# Altium PCB PCB_Heartband.PcbDoc
Units mm, origin at the board's own origin, x right, y up, seen from the top; angles counter-clockwise.
Board outline 44.96 x 25.27 mm, 4 copper layers (Top Layer, GND Plane, Power Plane, Bottom Layer), stack 1.508 mm thick; 36 components, 39 nets, 190 pads, 97 vias.
Unrouted connection lines stored in the file: 78.
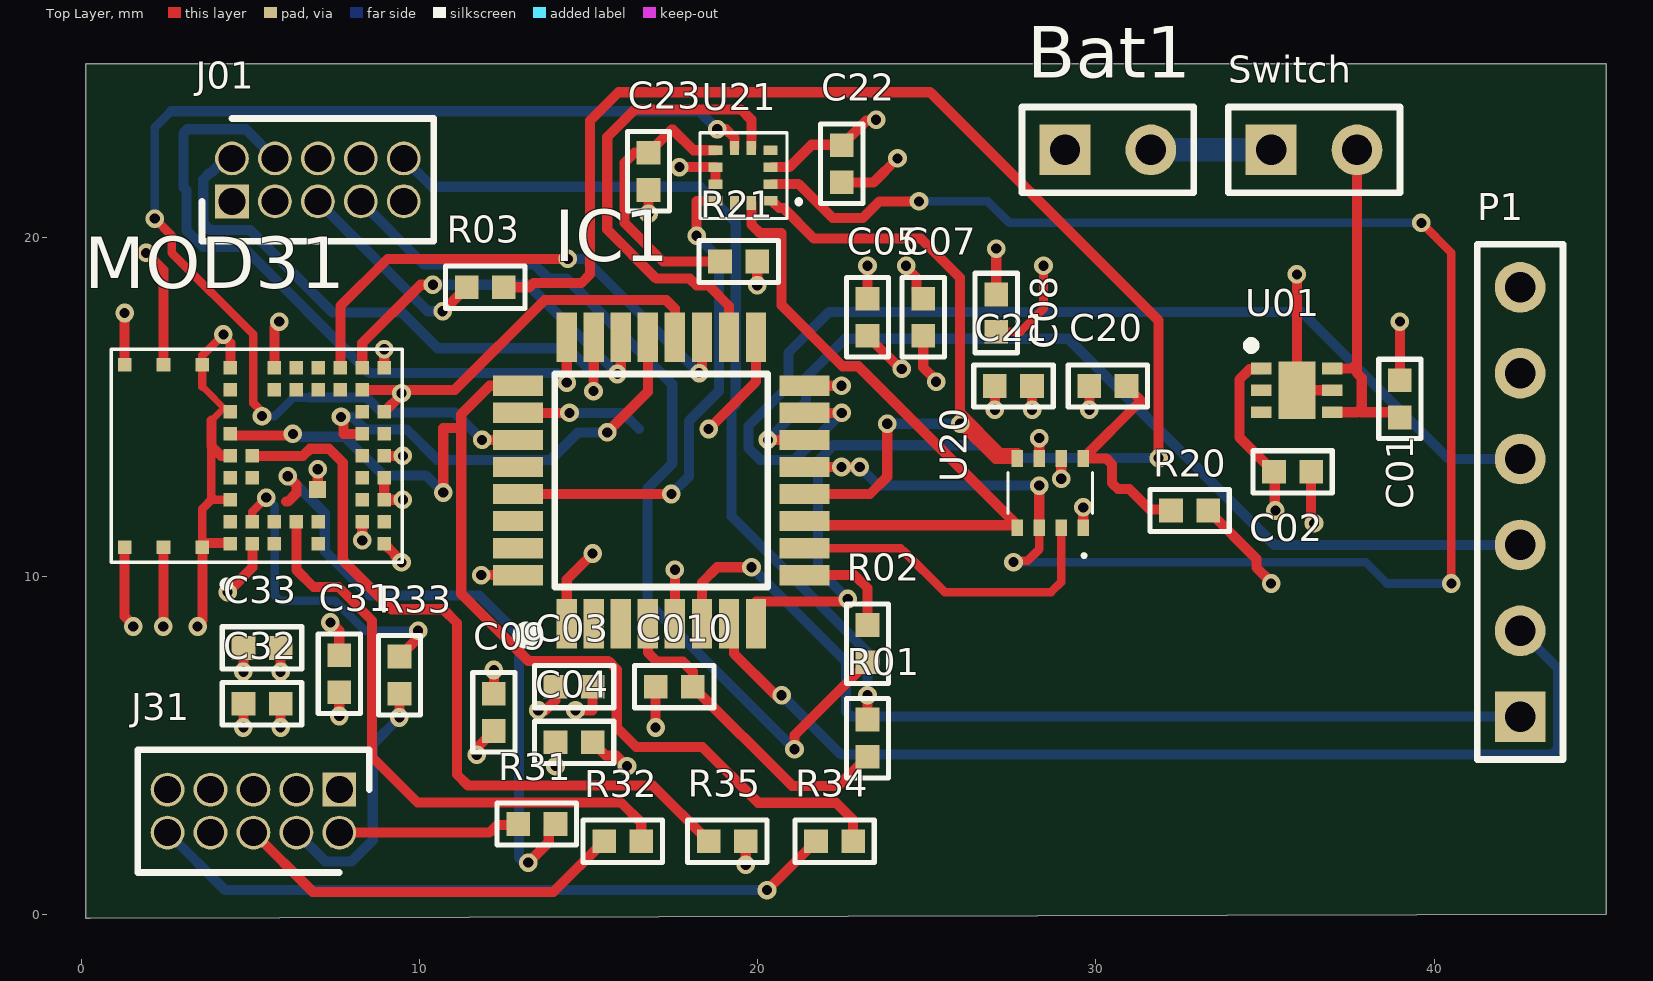
[diagram p0: Top Layer view]
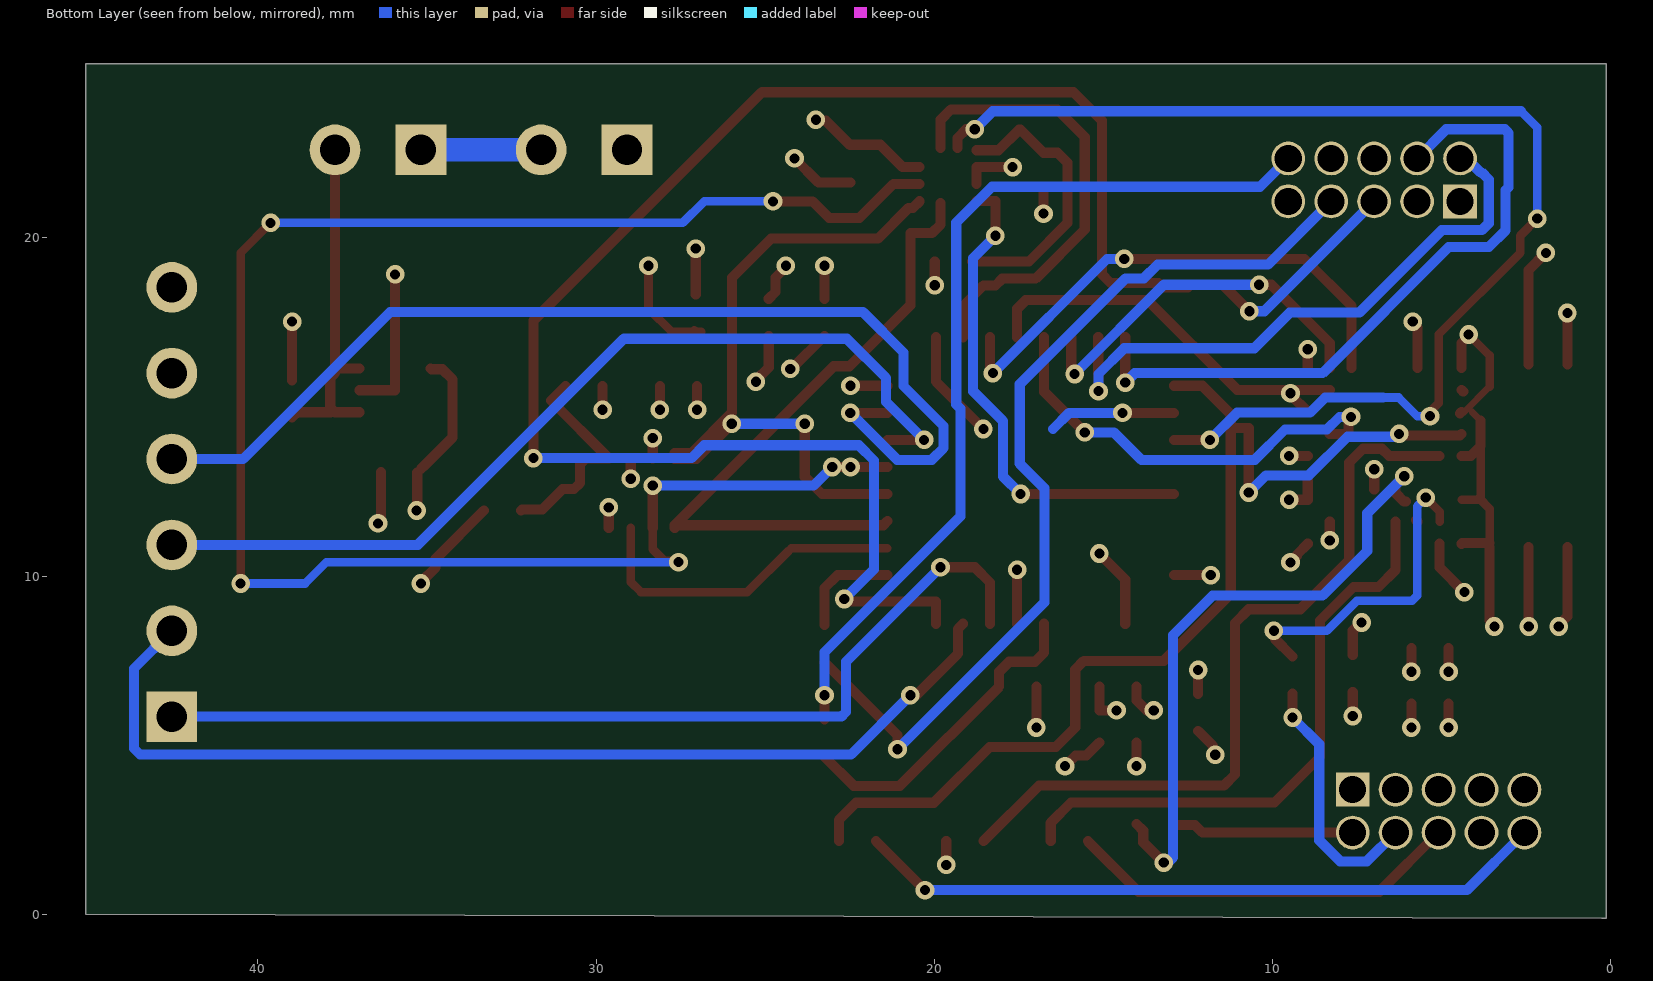
[diagram p1: Bottom Layer view, seen from below]
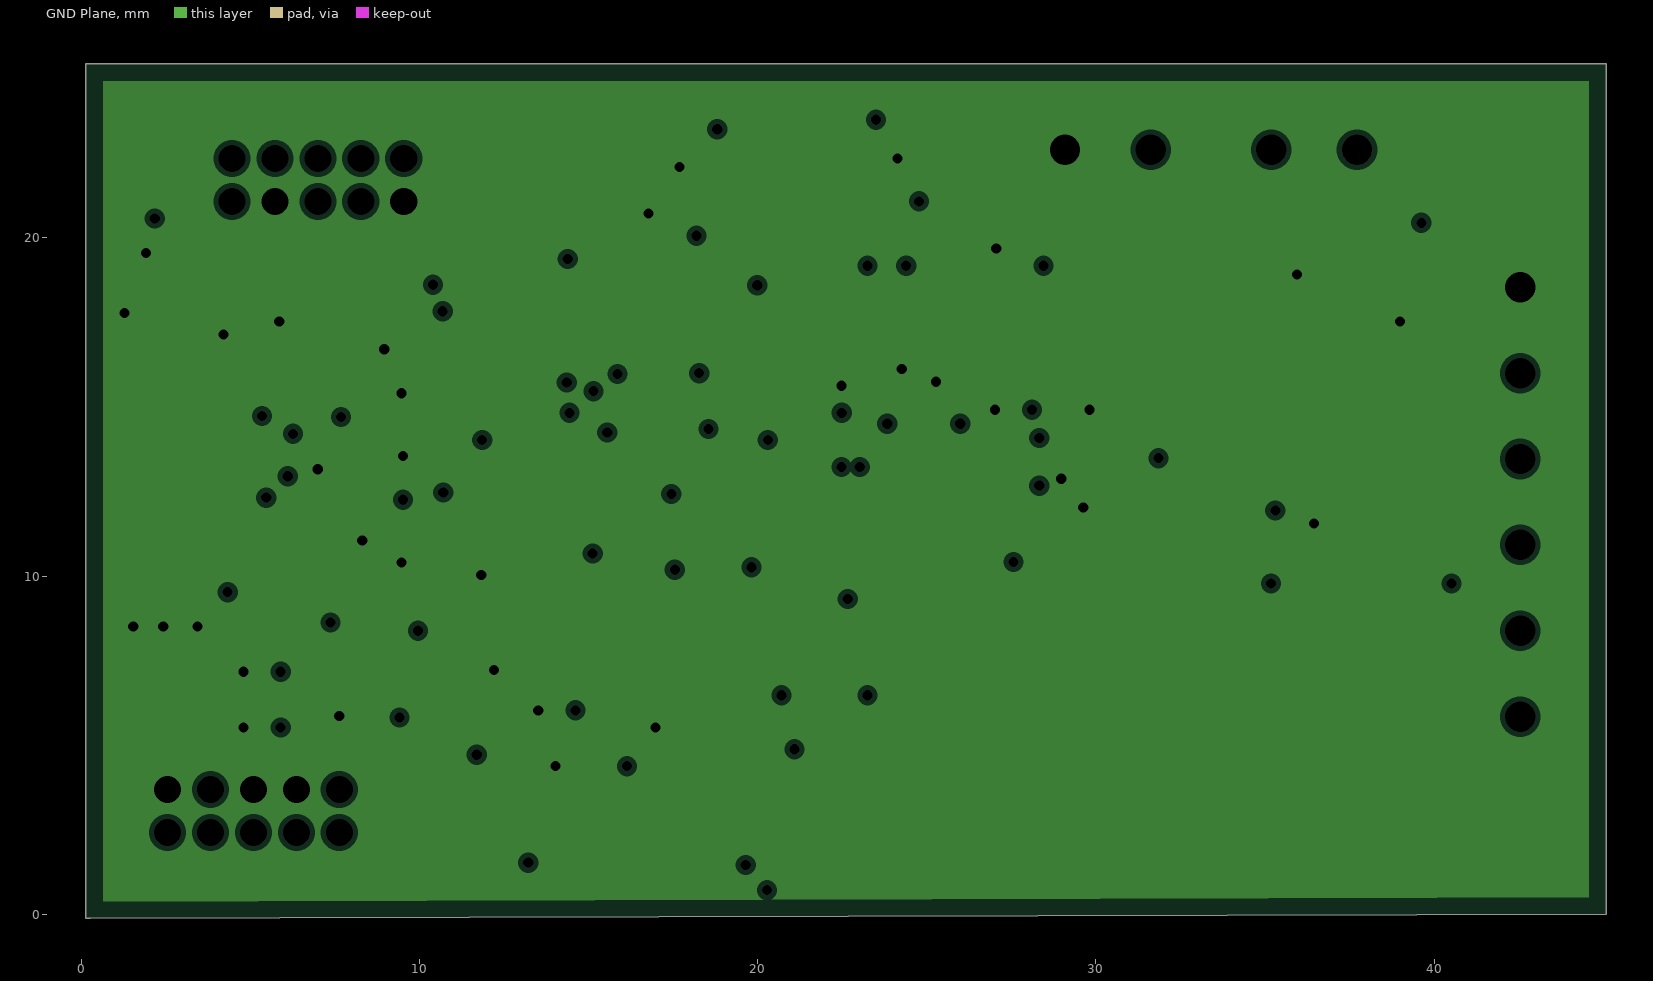
[diagram p2: GND Plane, clearances drawn from the general rule]
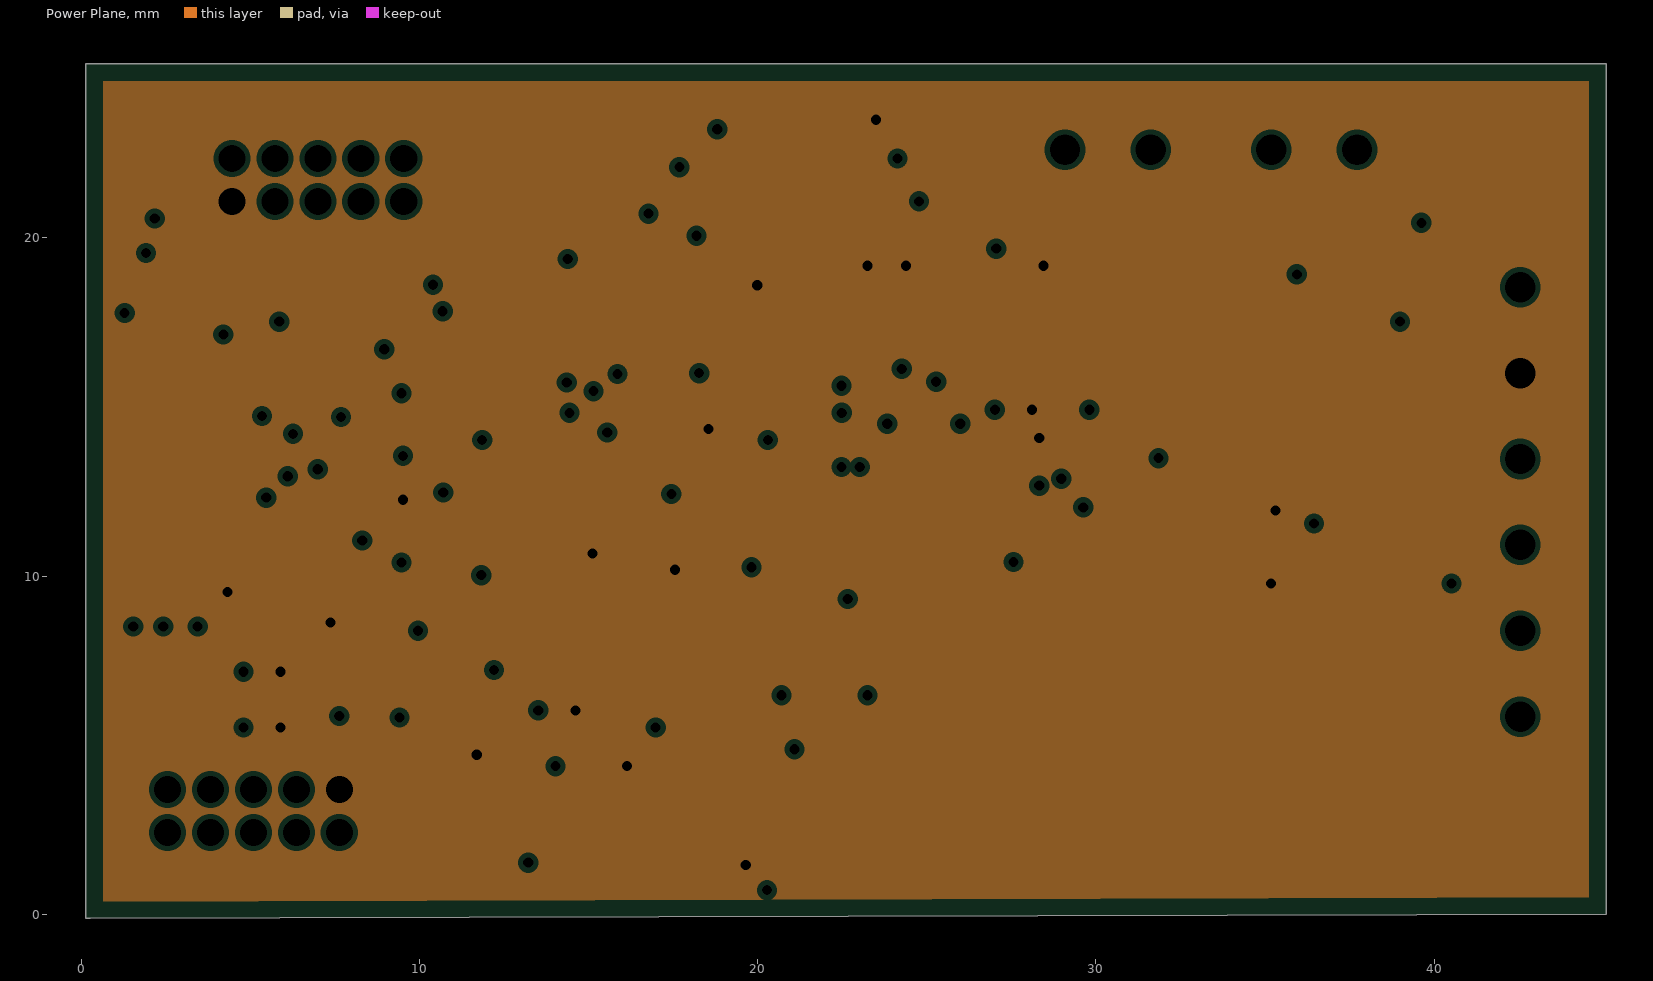
[diagram p3: Power Plane, clearances drawn from the general rule]
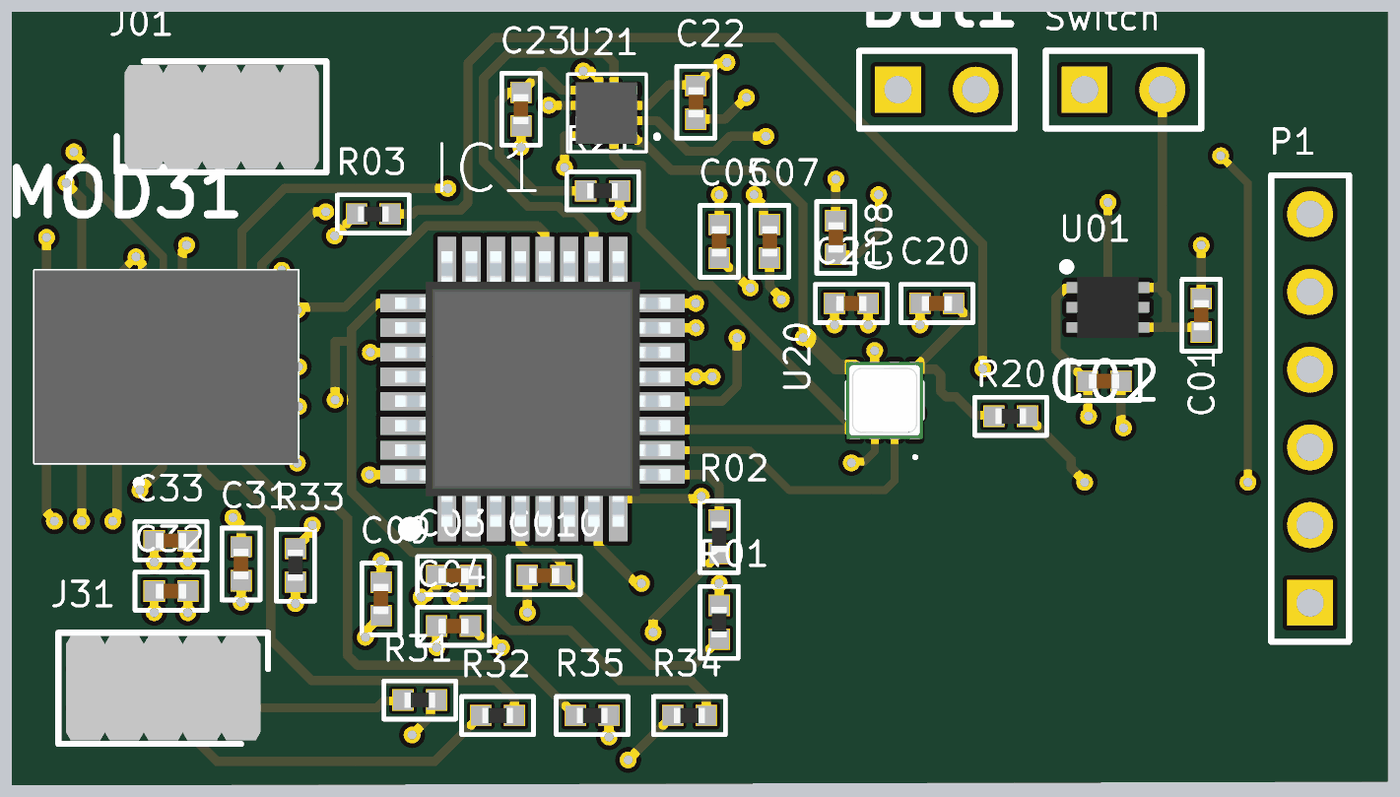
[diagram p4: 3D render of the assembled board from above, using the file's embedded part models]

## Layer stack, top to bottom
Top Solder: solder mask 0.0102, Solder Resist, Dk 3.5
Top Layer: signal copper 0.0356
Prepeg 11: prepreg 0.1727, PP-006, Dk 4.1
Prepreg 12: prepreg 0.1727, PP-006, Dk 4.1
GND Plane: plane copper 0.0178, net GND
CoreDielectric: prepreg 0.71, FR-4, Dk 4.8
Power Plane: plane copper 0.0178, net Vcc
Prepreg 21: prepreg 0.1727, PP-006, Dk 4.1
Prepreg 22: prepreg 0.1727, PP-006, Dk 4.1
Bottom Layer: signal copper 0.0356
Bottom Solder: solder mask 0.0102, Solder Resist, Dk 3.5

## Board outline
45.085,0 45.085,0.254 45.085,25.146 0.127,25.146 0.127,-0.127 0.254,-0.127

## Design rules (kind name [scope] priority, off if disabled: settings)
BoardOutlineClearance [All] p1: gap=0.2 ignorepadtopadclearanceinfootprint=FALSE
Clearance Clearance_safe [All] p1: gap=0.2 ignorepadtopadclearanceinfootprint=FALSE except(0.25: Arc-Hole Track-Hole SMDPad-Hole THPad-Hole Via-Hole Fill-Hole Poly-Hole Region-Hole Text-Hole)
Clearance Clearance_min [All] p2: gap=0.102 ignorepadtopadclearanceinfootprint=FALSE except(0.127: Arc-Via Track-Via SMDPad-Via THPad-Via Via-Via Via-Fill Via-Poly Via-Region Via-Text; 0.25: Arc-Hole Track-Hole SMDPad-Hole THPad-Hole Via-Hole Fill-Hole Poly-Hole Region-Hole Text-Hole)
ComponentClearance [All] p1: gap=0.102 collisioncheckmode=3 verticalgap=0.102 showdistances=TRUE
DiffPairsRouting [All] p1: maxlimit=0.102 minlimit=0.102 mostfreqgap=0.102 toplayer_minwidth=0.102 toplayer_maxwidth=1816.048 toplayer_prefwidth=0.102 bottomlayer_minwidth=0.102 bottomlayer_maxwidth=1816.048 bottomlayer_prefwidth=0.102 maxuncoupledlength=12.7
Height [All] p1: minheight=0 maxheight=1816.048 prefheight=12.7
HoleSize [All] p1: absolutevalues=TRUE maxlimit=6.3 minlimit=0.15 maxpercent=80.000 minpercent=20.000
HoleToHoleClearance [All] p1: gap=0.25 allowstackedmicrovias=FALSE
MinimumAnnularRing [All] p1: minimumring=0.076
MinimumSolderMaskSliver [All] p1: minsoldermaskwidth=0
PlaneClearance [All] p1: clearance=0.15
PlaneConnect PlaneConnectPowerPads [InPadClass('PowerPads')] p1: planeconnectstyle=Direct reliefexpansion=0.5 reliefentries=4 reliefconductorwidth=0.4 reliefairgap=0.2
PlaneConnect [All] p2: planeconnectstyle=Direct reliefexpansion=0.3 reliefentries=4 reliefconductorwidth=0.2 reliefairgap=0.15
PolygonConnect PolygonConnectPowerPads [All vs (InPadClass('PowerPads'))] p1: connectstyle=Direct reliefconductorwidth=0.254 reliefentries=4 polygonreliefangle="90 Angle" airgapwidth=0.254
PolygonConnect [All] p2: connectstyle=Direct reliefconductorwidth=0.102 reliefentries=4 polygonreliefangle="90 Angle" airgapwidth=0.102
RoomDefinition U_BL653u [InComponentClass('U_BL653u')] p1: confinementstyle=ConfineOut formatcopy=TRUE lockcomponents=FALSE outline -64.008,-0.127 -13.208,-0.127 -13.208,25.273 -64.008,25.273
RoomDefinition U_DigitalSensors [InComponentClass('U_DigitalSensors')] p2: confinementstyle=ConfineOut formatcopy=TRUE lockcomponents=FALSE outline -64.008,-0.254 -13.208,-0.254 -13.208,25.146 -64.008,25.146
RoomDefinition U_CPU&POWER [InComponentClass('U_CPU&POWER')] p3: confinementstyle=ConfineOut formatcopy=TRUE lockcomponents=FALSE outline -63.881,-0.254 -13.081,-0.254 -13.081,25.146 -63.881,25.146
RoutingVias [All] p1: holewidth=0.3 width=0.45 viastyle="Through Hole" minholewidth=0.3 minwidth=0.45 maxholewidth=6.3 maxwidth=6.55
SilkToSilkClearance [All] p1: silktosilkclearance=0
SilkToSolderMaskClearance [IsPad] p1: minsilkscreentomaskgap=0.1 clearancetoexposedcopper=TRUE
SolderMaskExpansion SolderMaskExpansion_safe [All] p1: expansion=0.15 istentingtop=FALSE
SolderMaskExpansion SolderMaskExpansion_min [All] p2: expansion=0.075 istentingtop=FALSE
Width Width_safe [All] p1: maxlimit=3 minlimit=0.25 preferedwidth=0.3 minimp=50.000000 maximp=50.000000 favimp=50.000000
Width Width_min [All] p2: maxlimit=1816.048 minlimit=0.102 preferedwidth=0.102
20 further rules are at their usual default settings.

## Classes and differential pairs
component class U_DigitalSensors: C20 C21 C22 C23 R20 R21 U20 U21
component class U_CPU&Power: Bat1 C01 C02 C03 C04 C05 C07 C08 C09 C010 IC1 J01 P1 R01 R02 R03 Switch U1 U01
component class U_BL653u: C31 C32 C33 J31 MOD31 R31 R32 R33 R34 R35

## Components (designator, comment, footprint, x,y, rotation, side; value= is the part's Value field where it differs from the comment)
Bat1 "Header 2" HDR1X2 29.083,22.606 r0 top
C01 "1uF" 0402_CAP 38.989,15.24 r270 top
C02 "1uF" 0402_CAP 35.814,13.081 r180 top
C03 "100nF" 0402_CAP 14.563,6.731 r180 top
C04 "100nF" 0402_CAP 14.563,5.08 r180 top
C05 "100nF" 0402_CAP 23.241,17.653 r270 top
C07 "1uF" 0402_CAP 24.892,17.653 r270 top
C08 "10uF" 0402_CAP 27.051,17.78 r90 top
C09 "10uF" 0402_CAP 12.192,5.969 r90 top
C010 "100nF" 0402_CAP 17.526,6.731 r0 top
C20 "100nF" 0402_CAP 30.353,15.621 r180 top
C21 "100nF" 0402_CAP 27.559,15.621 r180 top
C22 "100nF" 0402_CAP 22.479,22.195 r270 top
C23 "100nF" 0402_CAP 16.764,21.971 r90 top
C31 "100nF" 0402_CAP 7.62,7.112 r90 top
C32 "100nF" 0402_CAP 5.334,6.223 r0 top
C33 "100nF" 0402_CAP 5.334,7.874 r0 top
IC1 "STM32L051K8T6" QFP80P900X900X160-32N 17.145,12.827 r90 top
J01 "20021111-00010T4LF" HDRV10W41P127_2X5_635X343X575P_m 4.445,21.082 r0 top
J31 "20021111-00010T4LF" HDRV10W41P127_2X5_635X343X575P_m 7.62,3.683 r180 top
MOD31 "Laird, BL653u" 45300059C_m 5.18,13.556 r90 top
P1 "Header 6" HDR1X6 42.545,5.842 r90 top
R01 "100R" 0402_RES 23.241,5.207 r270 top
R02 "100R" 0402_RES 23.241,8.001 r270 top
R03 "100R" 0402_RES 11.938,18.542 r0 top
R20 "100R" 0402_RES 32.766,11.938 r180 top
R21 "100R" 0402_RES 19.431,19.304 r180 top
R31 "100R" 0402_RES 13.462,2.667 r180 top
R32 "100R" 0402_RES 16.002,2.159 r180 top
R33 "100R" 0402_RES 9.398,7.07 r90 top
R34 "100R" 0402_RES 22.267,2.159 r0 top
R35 "100R" 0402_RES 19.092,2.159 r0 top
Switch "Header 2" HDR1X2 35.179,22.606 r0 top
U01 "LP5912-Q1.5DRVRQ1" SON65P200X200X80-7N_m 35.941,15.494 r0 top
U20 "BME280" MODBME280_m 28.646,12.455 r270 top
U21 "BMA456" BOSCH_LGA-12 19.558,21.844 r180 top

## Footprints (in the part's own frame and the unit in brackets; to place one, negate y for a bottom-side part, rotate by r counter-clockwise, add the part's x,y. Pads: shape width x height; smd on the part's side, far side on the other; paste and mask are expansions set on the pad)
0402_CAP [mm]
  rect 0.7x0.7 smd paste-0.03 mask+0.1: 1(0.55,0) 2(-0.55,0)
  silkscreen extent -1.18,-0.62 1.17,0.62, body extent -0.5,-0.25 0.5,0.25, height 0.5
0402_RES [mm]
  rect 0.7x0.7 smd paste-0.03 mask+0.1: 1(0.55,0) 2(-0.55,0)
  silkscreen extent -1.18,-0.62 1.18,0.62, body extent -0.5,-0.25 0.5,0.25, height 0.3
45300059C_m [mm]
  rect 0.4x0.4 smd: 1(-2.6,0.78) 2(-1.95,0.78) 3(-1.3,0.78) 4(-0.65,0.78) 5(0,0.78) 6(0.65,0.78) 7(1.3,0.78) 8(1.95,0.78) 9(2.6,0.78) 11(2.6,-0.52) 12(2.6,-1.17) 13(2.6,-1.82) 14(2.6,-2.47) 15(2.6,-3.12) 16(2.6,-3.77) 18(1.3,-3.77) 19(0.65,-3.77) 20(0,-3.77) 21(-0.65,-3.77) 22(-1.3,-3.77) 23(-1.95,-3.77) 24(-2.6,-3.77) 27(-2.6,-1.82) 29(-2.6,-0.52) 30(-2.6,0.13) 31(-1.95,0.13) 33(-0.65,0.13) 34(0,0.13) 38(1.95,-0.52) 39(1.95,-1.17) 40(1.95,-1.82) 41(1.95,-2.47) 42(1.95,-3.12) 43(1.3,-3.12) 44(0.65,-3.12) 45(0,-3.12) 46(-0.65,-3.12) 47(-1.3,-3.12) 48(-1.95,-3.12) 50(-1.95,-1.82) 51(-1.95,-1.17) 52(-1.95,-0.52) G2(2.7,3.91) G3(2.7,2.76) G4(2.7,1.61) G5(-2.7,1.61) G6(-2.7,2.76) G7(-2.7,3.91)
  rect 0.5x0.5 smd: G1(-1,-1.8)
  silkscreen extent -3.9,-4.3 3.15,4.3, body extent -3.15,-4.3 3.15,4.3, height 1.7
BOSCH_LGA-12 [mm]
  rect 0.41x0.28 smd: 1(-0.815,0.75) 2(-0.815,0.25) 3(-0.815,-0.25) 4(-0.815,-0.75) 7(0.815,-0.75) 8(0.815,-0.25) 9(0.815,0.25) 10(0.815,0.75)
  rect 0.28x0.41 smd: 5(-0.25,-0.815) 6(0.25,-0.815) 11(0.25,0.815) 12(-0.25,0.815)
  silkscreen extent -1.65,-1.27 1.27,1.27, body extent -1,-1 1,1, height 1.02
HDR1X2 [mm] "Connector; Header; 2 Position"
  rect 1.5x1.5 hole 0.9: 1(0,0)
  round 1.5 hole 0.9: 2(2.54,0)
  silkscreen extent -1.27,-1.27 3.81,1.27
HDR1X6 [mm] "Connector; Header; 6 Position"
  rect 1.5x1.5 hole 0.9: 1(0,0)
  round 1.5 hole 0.9: 2(2.54,0) 3(5.08,0) 4(7.62,0) 5(10.16,0) 6(12.7,0)
  silkscreen extent -1.27,-1.27 13.97,1.27
HDRV10W41P127_2X5_635X343X575P_m [mm]
  rect 1x1 hole 0.8: 1(0,0)
  round 1 hole 0.8: 2(0,1.27) 3(1.27,0) 4(1.27,1.27) 5(2.54,0) 6(2.54,1.27) 7(3.81,0) 8(3.81,1.27) 9(5.08,0) 10(5.08,1.27)
  silkscreen extent -0.88,-1.18 5.96,2.45, body extent -0.64,-1.07 5.71,2.33, height 5.55
MODBME280_m [mm]
  rect 0.5x0.35 smd: 1(1.025,0.975) 2(1.025,0.325) 3(1.025,-0.325) 4(1.025,-0.975) 5(-1.025,-0.975) 6(-1.025,-0.325) 7(-1.025,0.325) 8(-1.025,0.975)
  silkscreen extent -0.6,-1.25 1.9,1.25, body extent -1.25,-1.25 1.25,1.25, height 0.93
QFP80P900X900X160-32N [mm]
  rect 1.475x0.6 smd: 1(-4.238,2.8) 2(-4.238,2) 3(-4.238,1.2) 4(-4.238,0.4) 5(-4.238,-0.4) 6(-4.238,-1.2) 7(-4.238,-2) 8(-4.238,-2.8) 17(4.238,-2.8) 18(4.238,-2) 19(4.238,-1.2) 20(4.238,-0.4) 21(4.238,0.4) 22(4.238,1.2) 23(4.238,2) 24(4.238,2.8)
  rect 0.6x1.475 smd: 9(-2.8,-4.238) 10(-2,-4.238) 11(-1.2,-4.238) 12(-0.4,-4.238) 13(0.4,-4.238) 14(1.2,-4.238) 15(2,-4.238) 16(2.8,-4.238) 25(2.8,4.238) 26(2,4.238) 27(1.2,4.238) 28(0.4,4.238) 29(-0.4,4.238) 30(-1.2,4.238) 31(-2,4.238) 32(-2.8,4.238)
  silkscreen extent -4.77,-3.15 3.15,4.2, body extent -4.5,-4.5 4.5,4.5, height 1.6
SON65P200X200X80-7N_m [mm]
  rect 0.6x0.35 smd: 1(-1.05,0.65) 2(-1.05,0) 3(-1.05,-0.65) 4(1.05,-0.65) 5(1.05,0) 6(1.05,0.65)
  rect 1.1x1.7 smd: 7(0,0)
  silkscreen extent -1.47,1.2 -1.22,1.45, body extent -1,-1 1,1, height 0.8

## Part data
Bat1 Switch: "Header, 2-Pin", LatestRevisionDate=17-Jul-2002, LatestRevisionNote="Re-released for DXP Platform.", Publisher="Altium Limited"
C01 C02 C03 C04 C05 C07 C08 C09 C010 C20 C21 C22 C23: library part Cap, "Ceramic capacitor"
C31 C32 C33: library part Capacitor_1, "Ceramic Capacitor", Parameter 1=100nF
IC1: "Integrated Circuit", Manufacturer_Name=STMicroelectronics, Mouser Part Number=511-STM32L051K8T6, Arrow Part Number=STM32L051K8T6, Arrow Price/Stock=https://www.arrow.com/en/products/stm32l051k8t6/stmicroelectronics?region=nac, Datasheet Link=https://www.mouser.in/datasheet/2/389/dm00108219-1798237.pdf, Height=1.6mm, Manufacturer_Part_Number=STM32L051K8T6, Mouser Price/Stock=https://www.mouser.co.uk/ProductDetail/STMicroelectronics/STM32L051K8T6?qs=s5SkPsIz108Y%252BphFHRhdjA%3D%3D
J01 J31: "Connector", Manufacturer_Name="Amphenol Communications Solutions", Mouser Part Number=649-221111-00010T4LF, Arrow Part Number=20021111-00010T4LF, Arrow Price/Stock=https://www.arrow.com/en/products/20021111-00010t4lf/amphenol-fci?region=europe, Datasheet Link=https://cdn.amphenol-cs.com/media/wysiwyg/files/drawing/20021111.pdf, Height=5.75mm, Manufacturer_Part_Number=20021111-00010T4LF, Mouser Price/Stock=https://www.mouser.co.uk/ProductDetail/Amphenol-FCI/20021111-00010T4LF?qs=nwYJ12Fl9gR8B5xkaYs9gA%3D%3D
MOD31: "BL653µ Integrated Antenna module, 453-00059", Manufacturer=Laird, Manufacturer Part Number=453-00059, Operating Temperature=-40C~85C, Datasheet Link=https://connectivity-staging.s3.us-east-2.amazonaws.com/s3fs-public/2018-12/BL654%20Datasheet%20v1_6.pdf, Mounting=SMT, Substitutes Allowed=NO
P1: "Header, 6-Pin", LatestRevisionDate=17-Jul-2002, LatestRevisionNote="Re-released for DXP Platform.", Publisher="Altium Limited"
R01 R02 R03 R20 R21: library part RES, "Resistor"
R31 R32 R33 R35: library part Resistor, Parameter 1=100R
R34: library part Resistor, "Resistor", Parameter 1=100R
U01: library part STAB

## Via types
v1: diameter 0.55, hole 0.3, Top Layer to Bottom Layer, 97 vias

## Nets (pads, with @x,y where several pads share a name; then routed paths per layer and width w, separated by ;. In a path a pad name is that pad's centre, name@x,y a point inside that pad or via, vN(x,y) a via of type N, cw(c..) or ccw(c..) an arc to the next point about the centre after c; other vN are vias at no path point)
ADC_IN0: IC1.6 P1.1 | length 28.3
  Top Layer w0.3: IC1.6 18.345,9.811 18.796,10.262 v1(19.812,10.262)
  Bottom Layer w0.3: v1(19.812,10.262) 22.608,7.466 22.608,5.977 22.742,5.842 P1.1
ADC_IN1: IC1.7 P1.2 | length 30.6
  Top Layer w0.3: IC1.7 19.295,8.439 19.295,7.707 20.496,6.506 20.672,6.506 v1(20.701,6.477)
  Bottom Layer w0.3: v1(20.701,6.477) 22.454,4.724 43.487,4.724 43.663,4.9 43.663,7.264 P1.2
ADC_IN8: IC1.14 P1.3 | length 27.5
  Top Layer w0.3: v1(20.295,14.027) IC1.14
  Bottom Layer w0.3: v1(20.295,14.027) 21.424,15.157 21.424,15.862 22.581,17.018 29.177,17.018 35.273,10.922 P1.3
ADC_IN9: IC1.15 P1.4 | length 31.8
  Top Layer w0.3: IC1.15 v1(22.479,14.827)
  Bottom Layer w0.3: v1(22.479,14.827) 21.089,13.437 20.066,13.437 19.72,13.783 19.72,14.436 20.904,15.621 20.904,16.612 22.098,17.805 36.094,17.805 40.437,13.462 P1.4
GND: Bat1.1 C01.2 C02.2 C03.1 C04.1 C05.1 C07.1 C08.1 C09.1 C010.2 C20.1 C21.1 C22.1 C23.2 C31.2 C32.2 C33.2 IC1.16 IC1.32 J01.3 J01.9 J31.3 J31.5 J31.9 MOD31.1 MOD31.3 MOD31.5 MOD31.7 MOD31.9 MOD31.11 MOD31.16 MOD31.18 MOD31.20 MOD31.24 MOD31.48 MOD31.G1 MOD31.G2 MOD31.G3 MOD31.G4 MOD31.G5 MOD31.G6 MOD31.G7 P1.6 U01.5 U01.7 U20.1 U20.7 U21.8 U21.9 | length 48.1
  Top Layer w0.2: 3.835,14.605 4.086,14.856
  Top Layer w0.3: MOD31.G7 1.27,8.804 1.524,8.55 v1(1.524,8.509) ; MOD31.G2 v1(1.27,17.78) ; v1(1.905,19.558) 2.42,19.043 MOD31.G3 ; v1(2.413,8.509) 2.417,8.513 2.417,10.853 MOD31.G6 ; v1(3.429,8.509) 3.429,8.55 3.57,8.691 MOD31.G5 ; MOD31.G5@3.57,10.973 4.383,10.973 MOD31.1 ; 3.835,14.605 3.835,13.843 4.122,13.556 MOD31.5 ; v1(4.191,17.145) 4.191,17.104 4.4,16.895 MOD31.9 ; MOD31.7 MOD31.7@4.45,14.806 ; v1(4.784,5.521) C32.2 ; v1(4.784,7.172) C33.2 ; MOD31.11 5.7,17.343 5.842,17.485 v1(5.842,17.526) ; MOD31.G1 v1(6.98,13.158) ; v1(7.62,5.86) C31.2 ; v1(8.3,11.054) MOD31.48 ; MOD31.24 9.266,10.64 9.266,10.596 v1(9.458,10.404) ; MOD31.20 v1(9.502,13.556) ; MOD31.18 9.458,15.364 v1(9.458,15.408) ; MOD31.16 v1(8.95,16.708) ; v1(11.818,10.027) IC1.32 ; C09.1 v1(12.192,7.221) ; v1(13.505,6.029) 13.716,6.029 14.013,6.326 C03.1 ; v1(14.013,4.378) C04.1 ; v1(16.764,20.719) C23.2 ; v1(16.976,5.521) C010.2 ; v1(17.678,22.094) U21.8 U21.9 ; IC1.16 v1(22.472,15.627) ; C22.1 23.423,21.645 v1(24.13,22.352) ; C05.1 24.186,16.158 24.228,16.158 v1(24.257,16.129) ; C07.1 24.892,16.17 25.273,15.789 v1(25.273,15.748) ; v1(27.009,14.919) C21.1 ; C08.1 v1(27.051,19.685) ; v1(28.971,12.878) U20.7 ; U20.1 v1(29.621,12.032) ; v1(29.803,14.919) C20.1 ; v1(35.941,18.923) U01.7 U01.5 ; C02.2 36.364,11.683 36.449,11.598 v1(36.449,11.557) ; C01.2 v1(38.989,17.526)
NetBat1_2: Bat1.2 Switch.1 | length 3.6
  Bottom Layer w0.7: Bat1.2 Switch.1
NetC01_1: C01.1 Switch.2 U01.4 U01.6 | length 10.6
  Top Layer w0.3: U01.4 37.719,14.844 37.861,14.986 37.861,15.86 37.719,16.002 37.719,16.144 Switch.2 ; U01.6 37.577,16.144 37.719,16.286 ; 37.861,14.844 38.1,14.844 38.835,14.844 C01.1
NetC20_2: C20.2 R20.1 U20.8 | length 6.6
  Top Layer w0.3: C20.2 31.329,15.195 29.621,13.487 U20.8 30.299,13.48 30.475,13.304 30.475,12.749 30.651,12.573 30.988,12.573 31.592,11.969 32.185,11.969 R20.1
NetC23_1: C23.1 R21.1 U21.7 | length 8.4
  Top Layer w0.3: U21.7 18.095,22.594 17.485,23.204 17.447,23.204 C23.1 16.349,22.521 16.053,22.225 16.053,20.447 17.196,19.304 R21.1
NetIC1_18: IC1.18 U21.5 | length 13.8
  Top Layer w0.3: IC1.18 19.145,17.99 18.542,18.593 18.186,18.593 17.983,18.796 16.997,18.796 15.545,20.248 15.545,22.987 16.358,23.8 19.503,23.8 19.808,23.495 U21.5
NetIC1_19: IC1.19 MOD31.14 | length 15.5
  Top Layer w0.3: MOD31.14 7.65,17.988 9.042,19.38 v1(14.376,19.38) ; v1(18.263,16.002) 18.345,16.084 IC1.19
  Bottom Layer w0.3: v1(14.376,19.38) 14.884,19.38 v1(18.263,16.002)
NetIC1_20: IC1.20 MOD31.42 | length 11.3
  Top Layer w0.3: MOD31.42 11.036,15.506 13.691,18.161 17.291,18.161 17.545,17.907 IC1.20
NetIC1_21: IC1.21 MOD31.44 | length 13.1
  Top Layer w0.3: v1(7.671,14.707) 7.747,14.63 7.747,14.206 MOD31.44 ; v1(15.545,14.249) 16.745,15.45 IC1.21
  Bottom Layer w0.3: v1(7.671,14.707) 8.009,14.707 8.383,14.333 9.619,14.333 10.516,13.437 13.87,13.437 14.682,14.249 v1(15.545,14.249)
NetIC1_22: IC1.22 MOD31.15 | length 11.2
  Top Layer w0.3: MOD31.15 8.3,16.891 10.027,18.618 v1(10.389,18.618) ; v1(15.846,15.977) 15.945,16.076 IC1.22
  Bottom Layer w0.3: v1(10.389,18.618) 13.204,18.618 v1(15.846,15.977)
NetIC1_23: IC1.23 J01.2 | length 17.9
  Top Layer w0.3: v1(15.138,15.469) 15.138,15.977 15.145,15.983 IC1.23
  Bottom Layer w0.3: J01.2 4.256,22.352 3.843,21.939 3.807,21.939 3.595,21.727 3.595,20.437 3.8,20.232 4.986,20.232 7.427,17.791 9.481,17.791 10.533,16.739 14.376,16.739 15.138,15.977 v1(15.138,15.469)
NetIC1_24: IC1.24 J01.4 | length 20.5
  Top Layer w0.3: v1(14.345,15.723) IC1.24
  Bottom Layer w0.3: J01.4 4.851,23.216 3.124,23.216 3.017,23.108 3.017,21.494 3.095,21.416 3.095,20.23 3.593,19.732 4.779,19.732 8.509,16.002 14.066,16.002 v1(14.345,15.723)
NetIC1_25: IC1.25 MOD31.6 R34.1 | length 32.8
  Top Layer w0.3: MOD31.6 4.449,14.157 6.159,14.157 6.208,14.206 v1(6.248,14.206) ; v1(10.693,12.471) 10.693,14.382 11.227,14.382 ; IC1.25 12.071,15.627 11.227,14.783 11.227,14.382 ; R34.1 22.817,2.786 22.309,3.294 20.007,3.294 18.355,4.946 16.401,4.946 15.824,5.523 15.824,7.239 15.57,7.493 13.208,7.493 11.227,9.474 11.227,14.382
  Bottom Layer w0.3: v1(6.248,14.206) 6.332,14.122 7.772,14.122 8.915,12.979 10.185,12.979 v1(10.693,12.471)
NetIC1_26: IC1.26 MOD31.8 | length 3.8
  Top Layer w0.3: MOD31.8@4.35,15.456 MOD31.8 ; IC1.26 v1(14.427,14.827)
  Bottom Layer w0.3: v1(14.427,14.827) 16.007,14.827 16.483,14.351
NetIC1_27: IC1.27 U21.6 | length 24
  Top Layer w0.3: v1(11.843,14.027) IC1.27 ; v1(18.8,23.216) 19.05,23.216 19.308,22.958 U21.6
  Bottom Layer w0.3: 2.642,23.749 18.267,23.749 v1(18.8,23.216) ; 6.731,15.282 8.434,15.282 8.883,14.833 11.037,14.833 v1(11.843,14.027)
NetJ01_5: J01.5 R03.2 | length 6
  Top Layer w0.3: v1(10.677,17.831) R03.2
  Bottom Layer w0.3: J01.5 10.236,17.831 v1(10.677,17.831)
NetJ01_7: J01.7 R02.1 | length 27.8
  Top Layer w0.3: v1(21.082,4.877) 21.082,5.292 R02.1
  Bottom Layer w0.3: J01.7 10.126,19.211 13.395,19.211 13.801,18.805 14.334,18.805 17.467,15.672 17.467,13.325 16.739,12.597 16.739,9.22 v1(21.082,4.877)
NetJ01_10: J01.10 R01.2 | length 27
  Top Layer w0.3: R01.2 v1(23.241,6.477)
  Bottom Layer w0.3: J01.10 10.363,21.514 18.288,21.514 19.345,20.457 19.345,15.077 19.22,14.951 19.22,11.768 23.241,7.747 v1(23.241,6.477)
NetJ31_2: J31.2 R31.1 | length 5.4
  Top Layer w0.3: J31.2 12.065,2.413 12.288,2.636 R31.1@12.912,2.636
NetJ31_4: J31.4 R33.2 | length 7.5
  Top Layer w0.3: v1(9.398,5.817) R33.2
  Bottom Layer w0.3: J31.4 7.2,1.563 7.989,1.563 8.611,2.184 8.611,5.029 v1(9.398,5.817)
NetJ31_6: J31.6 R32.1 | length 11.7
  Top Layer w0.3: J31.6 6.833,0.66 13.953,0.66 R32.1
NetJ31_10: J31.10 R34.2 | length 20.5
  Top Layer w0.3: v1(20.269,0.711) R34.2
  Bottom Layer w0.3: J31.10 4.242,0.711 v1(20.269,0.711)
NetMOD31_31: MOD31.31 R33.1 | length 1
  Top Layer w0.3: R33.1 9.921,8.143 9.921,8.353 v1(9.95,8.382)
  other v1: 5.461,12.319
NetMOD31_34: MOD31.34 R35.2 | length 22.7
  Top Layer w0.3: MOD31.34 6.546,13.556 6.756,13.767 7.315,13.767 7.722,13.36 7.722,10.465 9.169,9.017 10.693,9.017 11.1,8.611 11.1,4.133 11.43,3.803 16.898,3.803 R35.2
NetMOD31_51: MOD31.51 R32.2 | length 17.6
  Top Layer w0.3: MOD31.51 6.35,10.185 6.858,9.677 7.595,9.677 8.585,8.687 8.585,4.648 9.93,3.303 15.95,3.303 16.552,2.701 R32.2
NetMOD31_52: MOD31.52 R31.2 | length 18.9
  Top Layer w0.3: MOD31.52 MOD31.52@5.75,11.656 ; 6.05,12.201 6.1,12.201 6.35,12.451 6.35,12.7 v1(6.096,12.954) ; v1(13.208,1.524) 13.813,2.129 13.813,2.468 R31.2
  Bottom Layer w0.3: v1(6.096,12.954) 7.19,11.86 7.19,10.743 8.509,9.423 11.762,9.423 12.93,8.255 12.93,1.675 v1@13.157,1.448
RESET: C010.1 IC1.4 R01.1 | length 9.6
  Top Layer w0.3: IC1.4 16.745,7.741 17.018,7.468 17.78,7.468 18.076,7.172 C010.1 21.013,3.794 22.378,3.794 R01.1
SPI1_MISO: IC1.12 U20.5 U21.1 | length 21.3
  Top Layer w0.3: U21.1@20.428,21.084 20.622,20.89 20.752,20.89 21.662,19.98 24.826,19.98 25.975,18.831 25.975,14.843 27.178,13.64 27.671,13.64 U20.5 27.671,13.462 27.026,13.462 v1(25.984,14.503) ; IC1.12 23.317,12.427 23.825,12.935 v1(23.825,14.503)
  Bottom Layer w0.3: v1(23.825,14.503) v1(25.984,14.503)
SPI1_MOSI: IC1.13 U20.3 U21.2 | length 13.4
  Top Layer w0.3: U21.2@20.428,21.594 21.205,21.594 22.205,20.594 23.11,20.594 23.598,21.082 v1(24.765,21.082) ; IC1.13 v1(22.472,13.227) v1(23.012,13.227) ; U20.3 v1(28.321,12.675)
  Bottom Layer w0.3: v1(23.012,13.227) 23.565,12.675 v1(28.321,12.675)
SPI1_NSS_1: IC1.10 U20.2 | length 1.5
  Top Layer w0.254: 28.971,9.921 U20.2
SPI1_NSS_2: IC1.29 U21.10 | length 14.6
  Top Layer w0.3: IC1.29 v1(17.441,12.427) ; v1(18.186,20.066) 18.186,21.094 U21.10
  Bottom Layer w0.3: v1(17.441,12.427) 17.967,12.953 17.967,14.589 18.845,15.467 18.845,19.407 v1(18.186,20.066)
SPI1_SCK: IC1.11 U20.4 U21.12 | length 19.8
  Top Layer w0.3: U21.12 19.808,20.4 20.066,20.142 20.701,20.142 20.701,18.009 22.504,16.205 22.971,16.205 U20.4@27.671,11.505 ; IC1.11 21.505,11.505 27.646,11.505 27.671,11.48 U20.4
UART2_RX: IC1.9 R02.2 | length 3.1
  Top Layer w0.3: IC1.9 22.86,10.027 23.241,9.646 R02.2
UART2_TX: IC1.8 R03.1 | length 49.6
  Top Layer w0.3: R03.1 13.233,18.542 13.36,18.669 14.783,18.669 15.037,18.923 15.037,23.47 15.875,24.308 25.095,24.308 31.852,17.551 v1(31.852,13.487) ; IC1.8 19.945,9.246 22.657,9.246 v1(22.657,9.322)
  Bottom Layer w0.3: v1(22.657,9.322) 21.779,10.199 21.779,13.42 22.228,13.868 26.797,13.868 27.178,13.487 v1(31.852,13.487)
Vcc: C02.1 C03.2 C04.2 C05.2 C07.2 C08.2 C09.2 C21.2 C22.2 C31.1 C32.1 C33.1 IC1.1 IC1.5 IC1.17 J01.1 J31.1 MOD31.21 MOD31.22 MOD31.30 P1.5 R20.2 R21.2 R35.1 U01.1 U20.6 U21.3 | length 32.5
  Top Layer w0.3: v1(4.318,9.525) 5.05,10.257 MOD31.30 ; v1(5.884,5.521) C32.1 ; v1(5.884,7.172) C33.1 ; v1(7.357,8.627) 7.375,8.627 7.62,8.382 C31.1 ; MOD31.21 MOD31.22 v1(9.502,12.256) ; v1(11.684,4.717) 11.752,4.785 11.752,4.979 C09.2 ; IC1.1 14.345,9.9 v1(15.113,10.668) ; v1(14.605,6.029) 15.113,6.029 C03.2 ; C04.2 15.501,4.692 15.815,4.692 v1(16.129,4.378) ; IC1.5 v1(17.545,10.187) ; v1(18.542,14.351) 19.942,15.751 19.942,17.062 IC1.17 ; v1(19.642,1.457) R35.1 ; v1(19.981,18.602) R21.2 ; U21.3@20.428,22.094 20.93,22.094 21.594,22.758 C22.2@22.39,22.758 ; C22.2 23.2,23.466 23.466,23.466 v1(23.495,23.495) ; C05.2 v1(23.241,19.177) ; v1(24.384,19.177) 24.384,19.136 24.692,18.828 24.692,18.403 C07.2 ; v1(28.109,14.919) C21.2 ; U20.6 v1(28.321,14.082) ; R20.2 34.744,10.51 34.744,10.255 35.179,9.82 v1(35.179,9.779) ; U01.1 34.866,16.119 34.546,16.119 34.241,15.814 34.241,14.104 35.064,13.281 C02.1@35.179,13.166 ; C02.1 35.285,13.06 35.285,11.959 v1(35.306,11.938)
  other v1: 28.448,19.177
pads on no net: IC1.2 IC1.3 IC1.28 IC1.30 IC1.31 J01.6 J01.8 J31.7 J31.8 MOD31.2 MOD31.4 MOD31.12 MOD31.13 MOD31.19 MOD31.23 MOD31.27 MOD31.29 MOD31.33 MOD31.38 MOD31.39 MOD31.40 MOD31.41 MOD31.43 MOD31.45 MOD31.46 MOD31.47 MOD31.50 U01.2 U01.3 U21.4 U21.11
copper on no net: | length 79.6
  Top Layer w0.2: 3.57,15.607 4.321,14.856
  Top Layer w0.254: v1(2.159,20.574) 2.667,20.066 2.667,19.558 5.08,17.145 5.08,16.637 5.08,15.113 5.334,14.859 v1(5.334,14.732) ; 3.57,10.856 3.57,11.991 3.88,12.3 ; 3.57,15.607 3.57,16.256 3.57,16.524 4.191,17.145 ; 3.835,13.843 3.835,12.344 3.924,12.256 4.4,12.256 ; 5.05,11.606 5.05,11.908 5.461,12.319 ; 21.383,10.827 24.225,10.827 ; 24.3,10.752 25.527,9.525 28.671,9.525 28.971,9.825 28.971,9.921 ; 26.882,17.23 27.051,17.23 ; 27.093,17.272 27.051,17.23 ; v1(27.559,10.414) 27.597,10.452 27.978,10.452 28.321,10.795 28.321,11.43 ; 28.448,19.177 28.448,17.907 27.771,17.23 27.051,17.23 ; v1(39.624,20.447) 40.513,19.558 40.513,19.431 v1(40.513,9.779)
  Bottom Layer w0.254: v1(2.159,20.574) 2.159,23.241 2.159,23.266 2.642,23.749 2.642,23.724 ; v1(5.334,14.732) 5.715,14.732 6.265,15.282 6.731,15.282 ; 5.461,12.319 5.715,12.065 5.715,9.42 5.864,9.271 7.493,9.271 8.382,8.382 9.95,8.382 ; 24.765,21.082 26.797,21.082 27.432,20.447 v1(39.624,20.447) ; v1(27.559,10.414) 37.973,10.414 38.608,9.779 v1(40.513,9.779)

## Polygon pours and split planes (outlines as drawn)
Vcc on Power Plane (split plane): 44.575,0.509 0.637,0.385 0.637,24.636 44.575,24.636
GND on GND Plane (split plane): 44.575,0.509 0.637,0.385 0.637,24.636 44.575,24.636